# EAGLE board Bee Hive Mona parallel scara V0.1 (EAGLE 9.7.0)
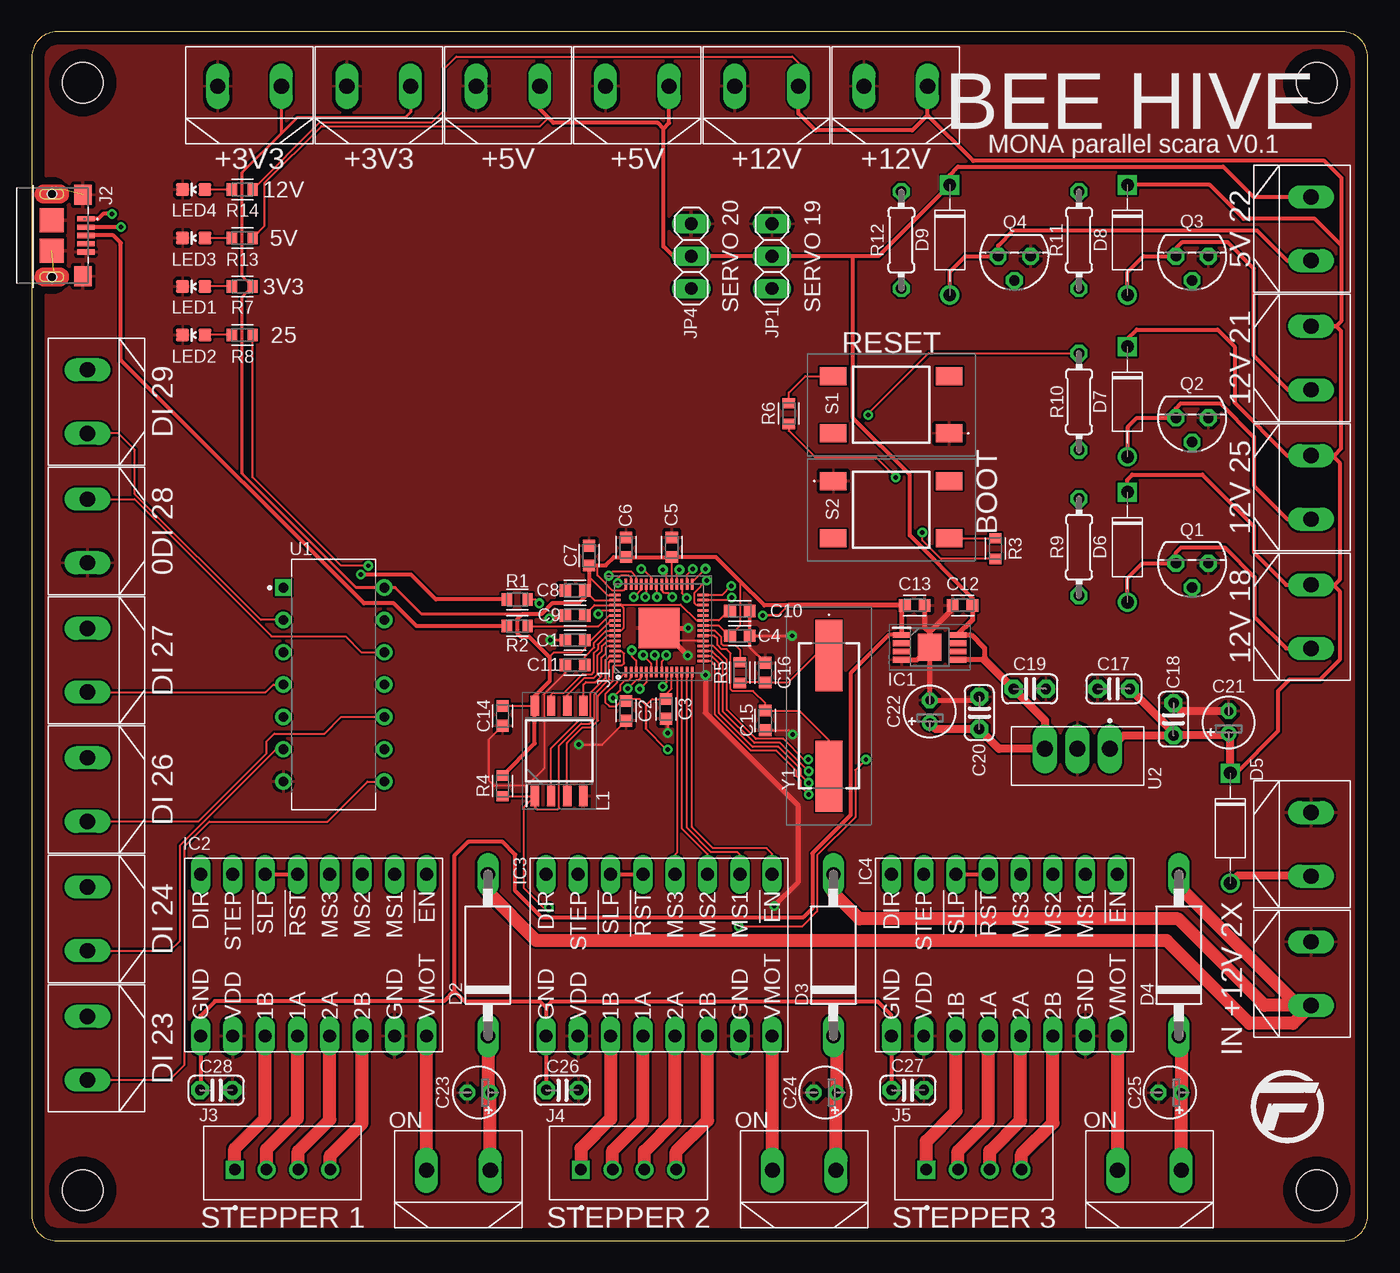
[diagram p0: board, top side]
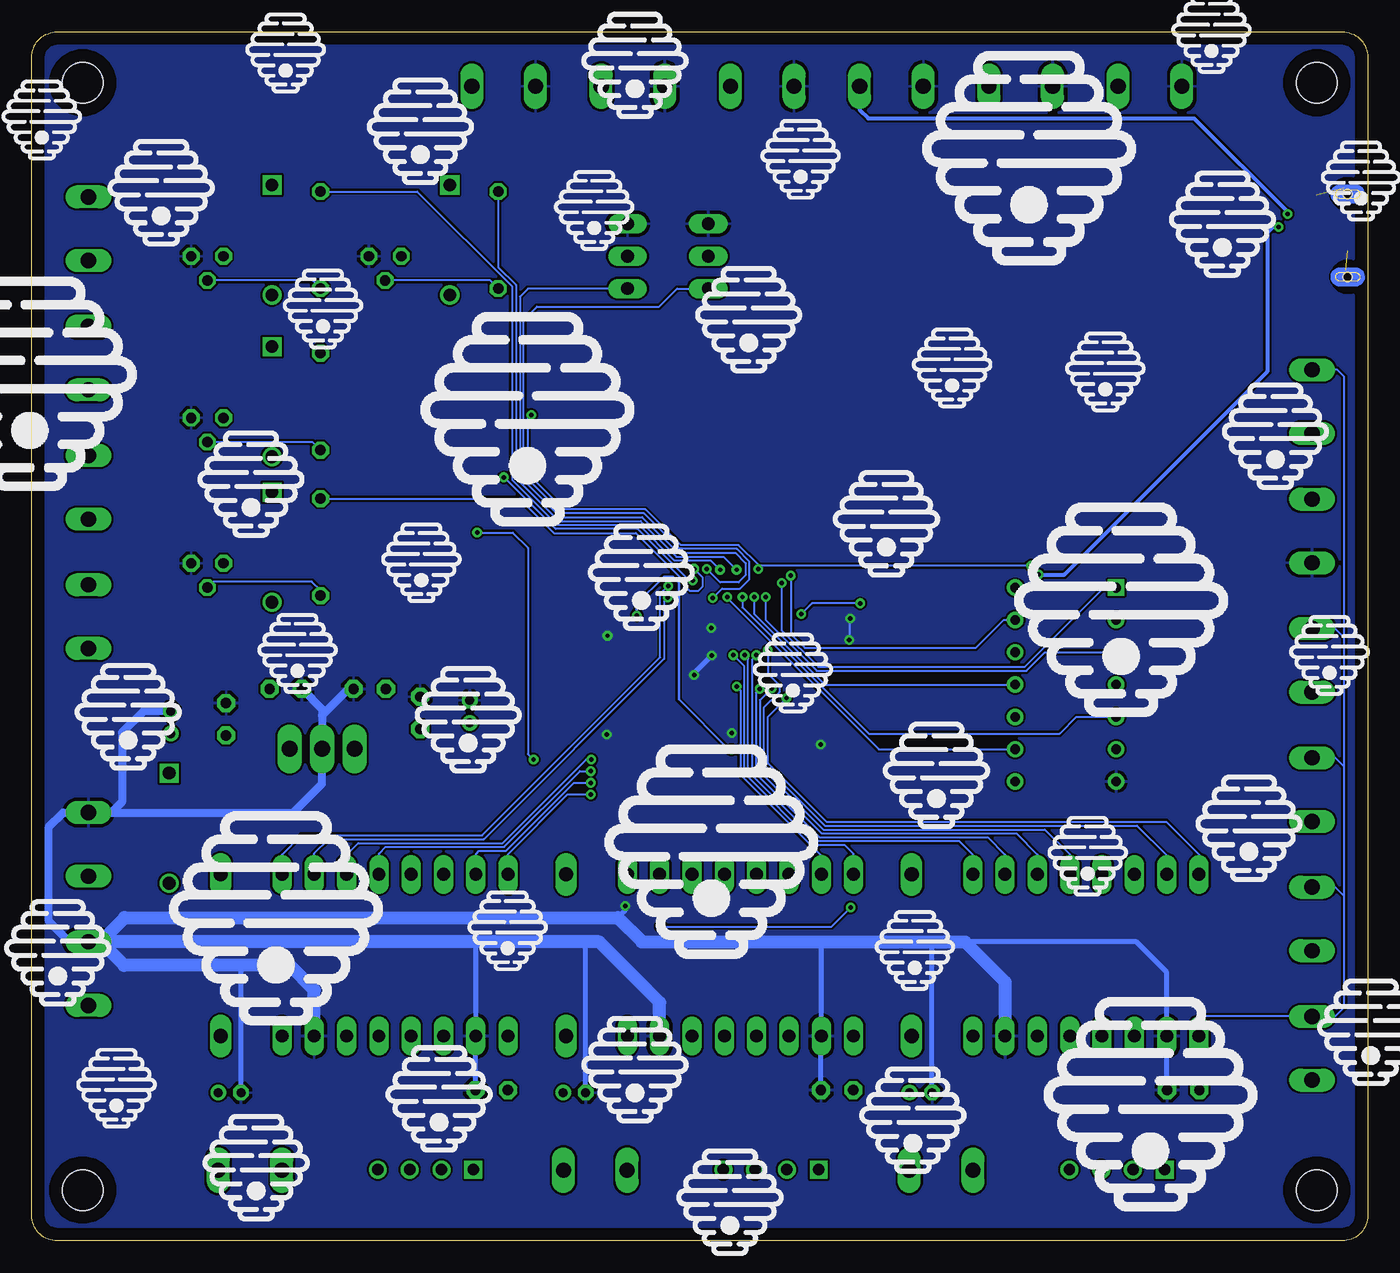
[diagram p1: board, bottom side, seen from below]

Size 105 x 95 mm. Coordinates in mm from the lower left corner, seen from the top.
Outline: 0,93 0,2 arc90 2,0 103,0 arc90 105,2 105,93 arc90 103,95 2,95 arc90 0,93
Copper layers (1*16): Top / Bottom
Stack-up Default Layer Stack: Top User Defined 0.035mm / Dielectric-1 User Defined 1.5mm / Bottom User Defined 0.035mm
Design rules: minimum drill size 0.35mm, minimum copper width 6mil, keepout clearance 0mil, drill distance 6mil, via restrict clearance 0mil, dimension clearance 40mil, restrict clearance 0mil, copper clearance wire_polygon to wire_polygon 6mil, copper clearance wire_polygon to pad_smd 6mil, copper clearance wire_polygon to via 6mil, copper clearance pad_smd to pad_smd 6mil, copper clearance pad_smd to via 6mil, copper clearance via to via 6mil, copper clearance smd to pad (same net) 6mil, copper clearance smd to via (same net) 6mil, copper clearance smd to smd (same net) 6mil
Holes 3.2 mm at 4,91 101,91 101,4 4,4

## Footprints (pad centres in the part's own frame; a part is rotated, then mirrored left to right if it is on the bottom)
CAPC1608X85 = smd 0.921 x 0.97: 1 -0.775,0; 2 0.775,0
C025-024X044 = drill 0.813 pad 1.422 octagon: 1 -1.27,0; 2 1.27,0
E1,8-4 = drill 0.711 pad 1.168: + -0.889,0 | drill 0.711 pad 1.168 octagon: - 0.889,0
DO15-12 = drill 1.118 long: A 6.35,0; C -6.35,0
DO-41 = drill 1: A 4.325,0 | drill 1 square: C -4.325,0
SOP65P490X110-9N = smd 1.4 x 0.45: 1 -2.2,0.975; 2 -2.2,0.325; 3 -2.2,-0.325; 4 -2.2,-0.975; 5 2.2,-0.975; 6 2.2,-0.325; 7 2.2,0.325; 8 2.2,0.975 | smd 1.846 x 2.15: 9 0,0
A4988 = drill 1.016 long: 1 -6.35,8.89; 2 -6.35,6.35; 3 -6.35,3.81; 4 -6.35,1.27; 5 -6.35,-1.27; 6 -6.35,-3.81; 7 -6.35,-6.35; 8 -6.35,-8.89; 9 6.35,-8.89; 10 6.35,-6.35; 11 6.35,-3.81; 12 6.35,-1.27; 13 6.35,1.27; 14 6.35,3.81; 15 6.35,6.35; 16 6.35,8.89
QFN40P700X700X90-57N = smd 0.85 x 0.2: 1 -3.45,2.6; 2 -3.45,2.2; 3 -3.45,1.8; 4 -3.45,1.4; 5 -3.45,1; 6 -3.45,0.6; 7 -3.45,0.2; 8 -3.45,-0.2; 9 -3.45,-0.6; 10 -3.45,-1; 11 -3.45,-1.4; 12 -3.45,-1.8; 13 -3.45,-2.2; 14 -3.45,-2.6; 29 3.45,-2.6; 30 3.45,-2.2; 31 3.45,-1.8; 32 3.45,-1.4; 33 3.45,-1; 34 3.45,-0.6; 35 3.45,-0.2; 36 3.45,0.2; 37 3.45,0.6; 38 3.45,1; 39 3.45,1.4; 40 3.45,1.8; 41 3.45,2.2; 42 3.45,2.6 | smd 0.2 x 0.85: 15 -2.6,-3.45; 16 -2.2,-3.45; 17 -1.8,-3.45; 18 -1.4,-3.45; 19 -1,-3.45; 20 -0.6,-3.45; 21 -0.2,-3.45; 22 0.2,-3.45; 23 0.6,-3.45; 24 1,-3.45; 25 1.4,-3.45; 26 1.8,-3.45; 27 2.2,-3.45; 28 2.6,-3.45; 43 2.6,3.45; 44 2.2,3.45; 45 1.8,3.45; 46 1.4,3.45; 47 1,3.45; 48 0.6,3.45; 49 0.2,3.45; 50 -0.2,3.45; 51 -0.6,3.45; 52 -1,3.45; 53 -1.4,3.45; 54 -1.8,3.45; 55 -2.2,3.45; 56 -2.6,3.45 | smd 3.2 x 3.2: 57 0,0
TE_2013499-1 = smd 0.4 x 1.35: 1 -1.3,0; 2 -0.65,0; 3 0,0; 4 0.65,0; 5 1.3,0 | smd 1.6 x 1.4: 6 3.2,-0.225; 7 -3.2,-0.225 | smd 1.9 x 1.9: 8 -1.2,-2.675; 9 1.2,-2.675 | smd 0.1 x 0.1: 10 -3.76,-2.37; 11 2.75,-2.53 | hole 0.71: -3.255,-2.675; 3.255,-2.675
B4B-XH-A(LF)(SN) = drill 0.9 square: 1 -3.75,0 | drill 0.9: 2 -1.25,0; 3 1.25,0; 4 3.75,0
1X03 = drill 1.016 long: 1 -2.54,0; 2 0,0; 3 2.54,0
SOIC127P780X195-8N = smd 1.6 x 0.65: 1 -3.55,1.905; 2 -3.55,0.635; 3 -3.55,-0.635; 4 -3.55,-1.905; 5 3.55,-1.905; 6 3.55,-0.635; 7 3.55,0.635; 8 3.55,1.905
0603-GREEN = smd 1 x 1: A 0,-0.877; C 0,0.877
0603-BLUE = smd 1 x 1: A 0,-0.877; C 0,0.877
TO92 = drill 0.813 octagon: 1 1.27,0; 2 0,1.905; 3 -1.27,0
RESC1608X60 = smd 0.799 x 0.974: 1 -0.815,0; 2 0.815,0
0204/7 = drill 0.813 octagon: 1 -3.81,0; 2 3.81,0
TS046665BK160SMT = smd 2.1 x 1.4: 1 -4.55,2.25; 2 -4.55,-2.25; 3 4.55,2.25; 4 4.55,-2.25
DIP794W45P254L1969H508Q14 = drill 0.77 pad 1.17 square: 1 -3.97,7.62 | drill 0.77 pad 1.17: 2 -3.97,5.08; 3 -3.97,2.54; 4 -3.97,0; 5 -3.97,-2.54; 6 -3.97,-5.08; 7 -3.97,-7.62; 8 3.97,-7.62; 9 3.97,-5.08; 10 3.97,-2.54; 11 3.97,0; 12 3.97,2.54; 13 3.97,5.08; 14 3.97,7.62
TO255P1040X460X1968-3 = drill 1.27 pad 1.91 long: 1 0,0; 2 2.55,0; 3 5.1,0
KF301-2P = drill 1.2 pad 1.778 long: 1 -2.5,0; 2 2.5,0
ABLS = smd 5.6 x 2.1: 1 -4.75,0; 2 4.75,0

## Placement (x,y rotation side)
C1  100nF  [CAPC1608X85]  42.7,47.2 180 top
C2  100nF  [CAPC1608X85]  46.7,41.65 270 top
C3  100nF  [CAPC1608X85]  49.85,41.8 270 top
C4  100nF  [CAPC1608X85]  55.65,47.55 0 top
C5  100nF  [CAPC1608X85]  50.3,54.5 90 top
C6  100nF  [CAPC1608X85]  46.7,54.5 90 top
C7  100nF  [CAPC1608X85]  43.8,53.85 90 top
C8  1uF  [CAPC1608X85]  42.7,51.1 180 top
C9  1uF  [CAPC1608X85]  42.7,49.15 180 top
C10  100nF  [CAPC1608X85]  55.65,49.5 0 top
C11  100nF  [CAPC1608X85]  42.7,45.25 180 top
C12  100nF  [CAPC1608X85]  73.16,49.93 180 top
C13  100nF  [CAPC1608X85]  69.4,49.93 0 top
C14  100nF  [CAPC1608X85]  37,41.25 270 top
C15  27p  [CAPC1608X85]  57.65,40.9 90 top
C16  27p  [CAPC1608X85]  57.65,44.65 270 top
C17  10uF  [C025-024X044]  85.04,43.37 180 top
C18  100nF  [C025-024X044]  89.73,40.99 90 top
C19  10uF  [C025-024X044]  78.44,43.37 0 top
C20  100nF  [C025-024X044]  74.47,41.49 90 top
C21  100uF  [E1,8-4]  94.07,40.74 90 top
C22  100uf  [E1,8-4]  70.58,41.59 90 top
C23  100uf  [E1,8-4]  35.13,11.65 180 top
C24  100uf  [E1,8-4]  62.35,11.65 180 top
C25  100uf  [E1,8-4]  89.45,11.65 180 top
C26  100nF  [C025-024X044]  41.7,11.85 0 top
C27  100nF  [C025-024X044]  68.85,11.85 0 top
C28  100nF  [C025-024X044]  14.5,11.85 0 top
D2  BY299  [DO15-12]  35.85,22.45 90 top
D3  BY299  [DO15-12]  63,22.45 90 top
D4  BY299  [DO15-12]  90.15,22.45 90 top
D5  1N4007  [DO-41]  94.2,32.43 270 top
D6  1N4007  [DO-41]  86.12,54.51 270 top
D7  1N4007  [DO-41]  86.12,65.94 270 top
D8  1N4007  [DO-41]  86.12,78.64 270 top
D9  1N4007  [DO-41]  72.15,78.64 270 top
IC1  TLV76733DGNR  [SOP65P490X110-9N]  70.57,46.64 0 top
IC2  1182-A4988  [A4988]  22.15,22.45 270 top
IC3  1182-A4988  [A4988]  49.3,22.45 270 top
IC4  1182-A4988  [A4988]  76.45,22.45 270 top
J1  SC0914_7_  [QFN40P700X700X90-57N]  49.3,48.15 90 top
J2  2013499-1  [TE_2013499-1]  4.25,79 270 top
J3  B4B-XH-A(LF)(SN)  [B4B-XH-A(LF)(SN)]  19.7,5.6 0 top
J4  B4B-XH-A(LF)(SN)  [B4B-XH-A(LF)(SN)]  46.9,5.6 0 top
J5  B4B-XH-A(LF)(SN)  [B4B-XH-A(LF)(SN)]  74.05,5.6 0 top
JP1  PINHD-1X3  [1X03]  58.18,77.37 270 top
JP4  PINHD-1X3  [1X03]  51.83,77.37 270 top
L1  W25Q128JVSIQ_TR  [SOIC127P780X195-8N]  41.45,38.5 90 top
LED1  LED-GREEN0603  [0603-GREEN]  12.73,74.99 90 top
LED2  LED-BLUE0603  [0603-BLUE]  12.73,71.18 90 top
LED3  LED-GREEN0603  [0603-GREEN]  12.73,78.8 90 top
LED4  LED-GREEN0603  [0603-GREEN]  12.73,82.61 90 top
Q1  BC327  [TO92]  91.2,53.24 180 top
Q2  BC327  [TO92]  91.2,64.67 180 top
Q3  BC327  [TO92]  91.2,77.37 180 top
Q4  BC327  [TO92]  77.23,77.37 180 top
R1  27R  [RESC1608X60]  38.15,50.4 0 top
R2  27R  [RESC1608X60]  38.15,48.3 0 top
R3  1k  [RESC1608X60]  75.74,54.4 270 top
R4  DNP  [RESC1608X60]  37,35.75 90 top
R5  1k  [RESC1608X60]  55.65,44.65 90 top
R6  1k  [RESC1608X60]  59.5,65 270 top
R7  330R  [RESC1608X60]  16.54,74.99 0 top
R8  330R  [RESC1608X60]  16.54,71.18 0 top
R9  1k  [0204/7]  82.31,54.51 270 top
R10  1k  [0204/7]  82.31,65.94 270 top
R11  1k  [0204/7]  82.31,78.64 270 top
R12  1k  [0204/7]  68.34,78.64 270 top
R13  330R  [RESC1608X60]  16.54,78.8 0 top
R14  1k  [RESC1608X60]  16.54,82.61 0 top
S1  TS04-66-65-BK-160-SMT  [TS046665BK160SMT]  67.55,65.7 180 top
S2  TS04-66-65-BK-160-SMT  [TS046665BK160SMT]  67.55,57.45 0 top
U1  SN74HC14N  [DIP794W45P254L1969H508Q14]  23.74,43.71 0 top
U2  L7805CV  [TO255P1040X460X1968-3]  84.74,38.66 180 top
U$1  TERMINAL_2P  [KF301-2P]  33.53,5.55 0 top
U$2  TERMINAL_2P  [KF301-2P]  60.71,5.55 0 top
U$3  TERMINAL_2P  [KF301-2P]  87.85,5.55 0 top
U$4  TERMINAL_2P  [KF301-2P]  100.55,31.16 270 top
U$5  TERMINAL_2P  [KF301-2P]  100.55,21 270 top
U$6  TERMINAL_2P  [KF301-2P]  100.55,49.05 270 top
U$7  TERMINAL_2P  [KF301-2P]  100.55,59.21 270 top
U$8  TERMINAL_2P  [KF301-2P]  100.55,69.37 270 top
U$9  TERMINAL_2P  [KF301-2P]  100.55,79.53 270 top
U$10  TERMINAL_2P  [KF301-2P]  67.91,90.72 0 top
U$11  TERMINAL_2P  [KF301-2P]  37.43,90.72 0 top
U$12  TERMINAL_2P  [KF301-2P]  17.11,90.72 0 top
U$15  TERMINAL_2P  [KF301-2P]  57.75,90.72 0 top
U$16  TERMINAL_2P  [KF301-2P]  47.59,90.72 0 top
U$17  TERMINAL_2P  [KF301-2P]  27.27,90.72 0 top
U$18  TERMINAL_2P  [KF301-2P]  4.38,45.62 90 top
U$19  TERMINAL_2P  [KF301-2P]  4.38,25.3 90 top
U$20  TERMINAL_2P  [KF301-2P]  4.38,35.46 90 top
U$21  TERMINAL_2P  [KF301-2P]  4.38,15.14 90 top
U$22  TERMINAL_2P  [KF301-2P]  4.38,55.78 90 top
U$23  TERMINAL_2P  [KF301-2P]  4.38,65.94 90 top
Y1  ABLS-12.000MHZ-B4-T  [ABLS]  62.65,41.25 270 top

## Library data of the parts
C1-C16 = Capacitor; CATEGORY: Capacitor
C17-C28 = adafruit
D2-D4 = diode
D5-D9 = Diodes; CREATED_BY: PCBLayout.com; DIGIKEY_PART_NUMBER: 1N4007MSCT-ND; MANUFACTURER: Micro Commercial Co; MPN: 1N4007; PACKAGE: DO-41
IC1 = TLV76733DGNR; DESCRIPTION: LDO Voltage Regulators 1-A, 16-V, high-PSRR, high-accuracy, low-dropout voltage regulator with enable; HEIGHT: 1.1mm; MANUFACTURER_NAME: Texas Instruments; MANUFACTURER_PART_NUMBER: TLV76733DGNR; MOUSER_PART_NUMBER: 595-TLV76733DGNR; MOUSER_PRICE-STOCK: https://www.mouser.co.uk/ProductDetail/Texas-Instruments/TLV76733DGNR?qs=W%2FMpXkg%252BdQ7WCurh%2FfEdlw%3D%3D
IC2-IC4 = pololu-stepper-driver
J1 = SC0914_7_; DESCRIPTION: Microcontrollers connect the world of software to the world of hardware. They allow developers to write software which interacts with the physical world in the same deterministic, cycle-accurate manner as digital logic. They occupy the bottom left corner of the price/performance space, outselling their more powerful brethren by a factor of ten to one. They are the workhorses that power the digital transformation of our world.; HEIGHT: 0.9mm; MANUFACTURER_NAME: RASPBERRY-PI; MANUFACTURER_PART_NUMBER: SC0914(7); MOUSER_PART_NUMBER: 358-SC09147; MOUSER_PRICE-STOCK: https://www.mouser.co.uk/ProductDetail/Raspberry-Pi/SC09147?qs=T%252BzbugeAwjhSpdbCB4ve%252Bg%3D%3D
J2 = 2013499-1; AVAILABILITY: In Stock; CENTERLINE_PITCH: .65 mm[.025 in]; COMMENT: 2013499-1; DESCRIPTION: USB - micro B USB 2.0 Receptacle Connector 5 Position Surface Mount, Right Angle; Through Hole; MF: TE Connectivity; MP: 2013499-1; NUMBER_OF_POSITIONS: 5; PACKAGE: None; PRICE: None; PRODUCT_TYPE: Connector; PURCHASE-URL: https://pricing.snapeda.com/search?q=2013499-1&ref=eda
J3-J5 = Headers; CREATED_BY: PCBLayout.com; DIGIKEY_PARTNO: 455-2249-ND; MANUFACTURER: JST Sales America Inc.; MPN: B4B-XH-A(LF)(SN)
JP1 JP4 = Connector; CATEGORY: Headers; DESCRIPTION: Header, Straight, 3 Position; MANUFACTURER: Generic; MPN: Generic; OPERATING_TEMPERATURE: Generic; PART_STATUS: Active; PITCH: 0.100" (2.54mm); ROHS_COMPLIANCE: Generic; SERIES: Generic; SUB-CATEGORY: Headers, Male Pins; TYPE: Board to Board or Cable, Unshrouded, Through Hole, Straight
L1 = W25Q128JVSIQ_TR; DESCRIPTION: FLASH - NOR Memory IC 128Mb (16M x 8) SPI - Quad I/O 8-SOIC; HEIGHT: 1.95mm; MANUFACTURER_NAME: Winbond; MANUFACTURER_PART_NUMBER: W25Q128JVSIQ TR; MOUSER_PART_NUMBER: 454-W25Q128JVSIQTR; MOUSER_PRICE-STOCK: https://www.mouser.co.uk/ProductDetail/Winbond/W25Q128JVSIQ-TR?qs=qSfuJ%252Bfl%2Fd7vTyLA9kNdGw%3D%3D
LED1-LED4 = BeagleBone_Blue_R3
Q1-Q4 = transistor-pnp
R1-R8 R13 R14 = Resistor; CATEGORY: Resistor; SUB-CATEGORY: Fixed
R9-R12 = rcl; SPICEPREFIX: R
S1 S2 = TS04-66-65-BK-160-SMT; DESCRIPTION: Tactile Switches 6 x 6 mm, 6.5 mm Act Height, 160 gf, Black, Surface Mount, SPST,; HEIGHT: 6.7mm; MANUFACTURER_NAME: CUI Devices; MANUFACTURER_PART_NUMBER: TS04-66-65-BK-160-SMT; MOUSER_PART_NUMBER: 179-TS046665BK160SMT; MOUSER_PRICE-STOCK: https://www.mouser.co.uk/ProductDetail/CUI-Devices/TS04-66-65-BK-160-SMT?qs=A6eO%252BMLsxmTgRLoTHWtDYQ%3D%3D
U1 = SN74HC14N; AVAILABILITY: In Stock; DESCRIPTION: 6-ch, 2-V to 6-V inverters with Schmitt-Trigger inputs; MF: Texas Instruments; MP: SN74HC14N; PACKAGE: PDIP-14 Texas Instruments; PRICE: None; PURCHASE-URL: https://pricing.snapeda.com/search/part/SN74HC14N/?ref=eda
U2 = L7805CV; AVAILABILITY: In Stock; DESCRIPTION: Linear Voltage Regulator IC Positive Fixed 1 Output 1.5A TO-220; MF: STMicroelectronics; MP: L7805CV; PACKAGE: TO-220-3 STMicroelectronics; PRICE: None; PURCHASE-URL: https://pricing.snapeda.com/search/part/L7805CV/?ref=eda
U$1-U$12 U$15-U$23 = KF301-2P-Terminal
Y1 = ABLS-12.000MHZ-B4-T

## Nets
1.1V: C9.1 C10.1 C11.1 J1.23 J1.45 J1.50
+3V3: C1.1 C2.1 C3.1 C4.1 C5.1 C6.1 C7.1 C8.1 C13.1 C14.1 C26.1 C27.1 C28.1 IC1.1 IC2.9 IC3.9 IC4.9 J1.1 J1.10 J1.22 J1.33 J1.42 J1.43 J1.44 J1.48 J1.49 L1.8 R4.2 R7.2 U1.14 U$12.2 U$17.2 U$18.2 U$19.2 U$20.2 U$21.2 U$23.2
+5V: C12.1 C19.1 C20.1 C22.+ D9.C IC1.5 IC1.8 J2.1 JP1.2 JP4.2 R13.2 U2.3 U$9.1 U$11.2 U$16.2
+12V: C17.1 C18.1 C21.+ D5.C D6.C D7.C D8.C R14.2 U2.1 U$6.1 U$7.1 U$8.1 U$10.2 U$15.2
GND: C1.2 C2.2 C3.2 C4.2 C5.2 C6.2 C7.2 C8.2 C9.2 C10.2 C11.2 C12.2 C13.2 C14.2 C15.1 C16.1 C17.2 C18.2 C19.2 C20.2 C21.- C22.- C23.- C24.- C25.- C26.2 C27.2 C28.2 IC1.4 IC1.9 IC2.10 IC2.15 IC3.10 IC3.15 IC4.10 IC4.15 J1.19 J1.57 J2.5 J2.6 J2.7 J2.8 J2.9 J2.10 J2.11 JP1.1 JP4.1 L1.4 LED1.C LED2.C LED3.C LED4.C Q1.3 Q2.3 Q3.3 Q4.3 S1.1 S2.1 U1.7 U2.2 U$4.1 U$5.1 U$10.1 U$11.1 U$12.1 U$15.1 U$16.1 U$17.1 U$22.1
GPIO0: IC2.8 J1.2
GPIO1: IC2.7 J1.3
GPIO2: IC2.4 J1.4
GPIO3: IC2.3 J1.5
GPIO4: IC2.2 J1.6
GPIO5: IC2.1 J1.7
GPIO6: IC3.8 J1.8
GPIO7: IC3.7 J1.9
GPIO8: IC3.4 J1.11
GPIO9: IC3.3 J1.12
GPIO10: IC3.2 J1.13
GPIO11: IC3.1 J1.14
GPIO12: IC4.8 J1.15
GPIO13: IC4.7 J1.16
GPIO14: IC4.4 J1.17
GPIO15: IC4.3 J1.18
GPIO16: IC4.2 J1.27
GPIO17: IC4.1 J1.28
GPIO18: J1.29 R9.1
GPIO19: J1.30 JP1.3
GPIO20: J1.31 JP4.3
GPIO21: J1.32 R11.1
GPIO22: J1.34 R12.1
GPIO23: J1.35 U1.9
GPIO24: J1.36 U1.5
GPIO25: J1.37 R8.2 R10.1
GPIO26/ADC0: J1.38 U1.11
GPIO27/ADC1: J1.39 U1.3
GPIO28/ADC2: J1.40 U1.13
GPIO29/ADC3: J1.41 U1.1
N$3: D5.A U$4.2
N$4: R3.1 S2.4
N$5: R6.1 S1.4
N$6: C16.2 R5.1 Y1.1
N$8: LED2.A R8.1
N$10: IC2.11 J3.1
N$11: IC2.12 J3.2
N$12: IC2.13 J3.3
N$13: IC2.14 J3.4
N$14: IC2.5 IC2.6
N$16: IC2.16 U$1.1
N$17: IC3.16 U$2.1
N$18: IC4.16 U$3.1
N$22: IC3.11 J4.1
N$23: IC3.12 J4.2
N$24: IC3.13 J4.3
N$25: IC3.14 J4.4
N$26: IC3.5 IC3.6
N$30: C23.+ D2.C U$1.2
N$31: C24.+ D3.C U$2.2
N$32: C25.+ D4.C U$3.2
N$33: IC4.11 J5.1
N$34: IC4.12 J5.2
N$35: IC4.13 J5.3
N$36: IC4.14 J5.4
N$37: IC4.5 IC4.6
N$39: D6.A Q1.1 U$6.2
N$40: LED1.A R7.1
N$41: Q1.2 R9.2
N$42: D7.A Q2.1 U$7.2
N$43: Q2.2 R10.2
N$44: D8.A Q3.1 U$8.2
N$45: Q3.2 R11.2
N$46: D9.A Q4.1 U$9.2
N$47: Q4.2 R12.2
N$48: LED3.A R13.1
N$49: LED4.A R14.1
N$50: U1.8 U$21.1
N$52: U1.6 U$19.1
N$53: U1.4 U$18.1
N$54: U1.2 U$23.1
N$55: U1.10 U$20.1
N$56: U1.12 U$22.2
QSPI_SCLK: J1.52 L1.6
QSPI_SD0: J1.53 L1.5
QSPI_SD1: J1.55 L1.2
QSPI_SD2: J1.54 L1.3
QSPI_SD3: J1.51 L1.7
QSPI_SS: J1.56 L1.1 R3.2 R4.1
RUN: J1.26 R6.2
SWCLK: J1.24
SWDIO: J1.25
USB_D+: J2.3 R2.1
USB_D-: J2.2 R1.1
USB_DM: J1.46 R1.2
USB_DP: J1.47 R2.2
USB_ID: J2.4
VSS: D2.A D3.A D4.A U$5.2
XIN: C15.2 J1.20 Y1.2
XOUT: J1.21 R5.2

## Tracks (layer width: path | path; a pad name or v marks a point on that pad's centre or on a via)
1.1V
  Top 0.152: C9.1 43.48,49.2 44.23,49.95 J1.45 | C11.1 43.48,45.9 44.2,46.62 44.2,47 45.15,47.95 J1.50 46.3,47.95 46.5,48.16 46.5,49.74 46.3,49.95 J1.45 | C10.1 54.75,49.5 54,48.75 J1.23 52.25,48.75 51,50 46.35,50 46.3,49.95 J1.45
+3V3  (via drill 0.35)
  Top 0.152: 43.8,52.2 45.25,50.75 J1.43 J1.44 44.23,50.35 C8.1 | 45.3,48.55 43.95,47.2 C1.1 43.48,46.52 43.17,46.23 41.02,46.23 40.73,45.92 40.73,45.83 | J1.48 45.5,48.75 45.3,48.55 | J1.49 45.5,48.35 45.3,48.55 | J1.22 54,48.35 54.8,47.55 C4.1 55.65,48.33 55.65,51.85 | 39.52,42.02 L1.8 37.02,42.05 C14.1 | J1.10 50.3,43.4 49.85,42.95 C3.1 48.75,42.58 48.26,42.09 47.77,42.58 46.85,42.58 C2.1 46.35,42.42 45.92,42 45.4,42 45.06,42.34 45.06,42.94 45.99,43.87 45.99,43.99 J1.1 | C5.1 J1.33 | J1.42 46.7,51.35 46.45,51.1 45.65,51.1 44.45,52.3 44.45,53.08
  Top 0.2: v57.45,49.15 58.69,49.15 59.47,49.93 | v50,38.6 49.88,38.6 48.26,40.22 48.26,42.09
  Top 0.254: 67.56,11.87 C27.1 | IC3.9 40.43,16.08 | 13.26,11.88 C28.1 | 38.54,49.24 38.54,49.25 30.65,49.25 28.57,51.33 U1.14 25.51,51.33 16.55,60.29 16.55,74.19 R7.2 16.55,75.8 16.55,83.95 19.61,87.01 | U$12.2 19.61,87.01 | U$17.2 29.77,88.67 29.35,88.25 20.85,88.25 19.61,87.01
  Top 0.305: L1.8 39.55,42.84 40.73,44.02 40.73,45.83 39.07,47.48 38.42,47.48 38.15,47.76 38.15,48.85 38.54,49.24 40.05,49.24 40.91,50.1 42.98,50.1 43.48,50.6 C8.1 43.8,51.42 43.8,52.2 C7.1 44.45,53.08 45.1,53.08 45.75,53.73 C6.1 C5.1 53.77,53.73 55.65,51.85 57.57,49.93 59.65,49.93 | R4.2 39.52,39.09 39.52,42.02 | 67.56,11.87 IC4.9 67.56,17.74 66.5,18.8 40.85,18.8 40.41,18.36 | 40.41,18.36 IC3.9 | 40.41,18.36 39.92,18.85 34,18.85 33.2,19.65 | 40.43,16.08 C26.1 | 13.26,11.88 IC2.9 13.26,17.71 14.4,18.85 32.4,18.85 33.2,19.65 | IC1.1 67.36,47.62 64.35,44.6 64.35,33.45 61.35,30.45 61.35,26.15 60.6,25.4 40.1,25.4 38,27.5 38,30.35 37,31.35 34.3,31.35 33.2,30.25 33.2,19.65
  Top 0.406: IC1.1 68.37,49.67 C13.1 59.65,49.93 59.47,49.93
  Bottom 0.152: IC2.9 13.26,17.45 13.07,17.64 U$21.2 2.56,17.64 1.85,18.35 1.85,27.1 | 1.85,27.1 2.55,27.8 U$19.2 | 1.85,27.1 1.85,37.25 | 1.85,37.25 2.56,37.96 U$20.2 | 1.85,37.25 1.85,47.4 | 1.85,47.4 2.57,48.12 U$18.2 | U$23.2 2.39,68.44 1.85,67.9 1.85,47.4
  Bottom 0.2: v57.45,49.15 57.45,50.05 55.32,52.18 54.6,52.18 54.15,51.73 54.15,42.55 50.2,38.6 v50,38.6
+5V  (via drill 0.35)
  Top 0.152: R13.2 18.3,79.75 18.3,83.12 22.77,87.59 39.94,87.59 40.6,88.25
  Top 0.305: U$9.1 96.02,82.03 93.65,84.4 72.8,84.4 72.15,83.75 D9.C 66.56,77.37 64.55,77.37 | 64.55,77.37 JP1.2 JP4.2 50.43,77.37 49.65,78.15 49.65,87.4 | U$16.2 50.09,87.84 49.65,87.4 | U$11.2 39.93,88.92 40.6,88.25 41,87.85 49.2,87.85 49.65,87.4 | v6.3,80.7 5.6,80.7 5.2,80.3 J2.1 | C12.1 73.94,50.5 69,55.43 69,60.2 64.55,64.65 64.55,77.37
  Top 0.406: IC1.5 74.88,45.66 74.88,46.58 73.83,47.62 IC1.8 73.94,48.78 C12.1
  Top 0.61: C22.+ 71.06,40.22 C20.1 76.03,38.66 U2.3 79.64,40.9 C19.1 74.88,45.66
  Bottom 0.305: U$11.2 39.93,88.88 39.25,88.2 13.65,88.2 6.3,80.85 v6.3,80.7
+12V
  Top 0.152: R14.2 22.64,87.89 31.44,87.89 32.4,88.85 32.4,92.1 33.35,93.05 59.77,93.05 60.25,92.57 U$15.2
  Top 0.305: D7.C 86.12,70.87 86.85,71.6 93.2,71.6 94.54,70.26 94.54,65.86 98.69,61.71 U$7.1 | D8.C 92.58,82.97 95.25,80.3 100.85,80.3 102.95,78.2 | 102.95,78.2 102.95,72.3 102.55,71.9 100.58,71.9 U$8.1 102.53,71.87 102.9,71.5 102.9,62.25 102.36,61.71 U$7.1 | D6.C 86.1,58.85 86.1,59.8 86.5,60.2 92,60.2 96.05,56.15 96.05,54.1 98.6,51.55 U$6.1 | U$7.1 102.24,61.71 102.8,61.15 102.8,51.95 102.4,51.55 U$6.1 | U$6.1 102.3,51.55 102.8,51.05 102.8,45.65 101.25,44.1 98.85,44.1 97.95,43.2 97.95,40.05 94.66,36.76 D5.C | 102.95,78.2 102.95,83.5 101.59,84.86 73.99,84.86 70.41,88.44 70.41,88.45 | 70.41,88.45 U$10.2 | U$15.2 60.25,88.6 61.6,87.25 69.21,87.25 70.41,88.45
  Top 0.61: D5.C 94.2,39.72 C21.+ 93.94,39.72 C18.1 | C17.1 89.73,39.95 C18.1 | U2.1 85.8,39.72 C18.1
GND  (via drill 0.35)  (2 unrouted)
  Top 0.152: C15.1 59.48,40.12 v59.8,39.8 | C9.2 41.68,48.91 v40.68,48.91 | C1.2 v40.76,47.2 v40.75,47.21 | J1.19 50.3,47.15 J1.57 | C11.2 41.92,44.61 40.26,42.95 40.26,37.11 39.13,35.98 39.12,35.98 38.9,35.75 36.35,35.75 35.95,36.15 35.95,39.42 C14.2
  Top 0.2: C2.2 44.83,39 v43,39 | C3.2 50,40.88 v50,39.9
  Top 0.254: C10.2 C4.2 | C4.2 56.42,46.65 C16.1 | C4.2 v59.75,47.55
  Top 0.406: IC1.9 70.58,47.78 70.17,48.18 C13.2 | IC1.9 70.56,47.84 72.39,49.66 C12.2 | IC1.4 69.59,45.66 IC1.9 | IC1.9 C22.- 74.19,42.48 C20.2 | v51.6,48.15 J1.57 49.4,48.15 v51.55,46 | v52.95,44.45 52.95,41.5 60.2,34.25 60.2,28.15 v58.35,26.3
  Top 0.61: C21.- 90.36,41.63 C18.2
  Bottom 0.152: v40.75,47.21 40.68,47.28 v40.68,48.91
  Bottom 0.406: C25.- 88.56,21.61 88.6,21.65 | C24.- 61.46,23.46 61.5,23.5 | C23.- 34.24,23.44 34.3,23.5 | C26.2 42.97,16.08 IC3.10 42.95,23.5 | C27.2 70.12,16.08 IC4.10 70.1,23.5 | C28.2 15.77,16.07 IC2.10 15.8,21.1 18.2,23.5 31.65,23.5 | v51.55,46 52.95,44.6 v52.95,44.45 | v58.35,26.3 58.35,26 58.95,25.4
  Bottom 0.61: C21.- 96.22,41.63 97.9,39.95 97.9,34.5 98.74,33.66 U$4.1 | C17.2 82.19,41.79 U2.2 | C19.2 80.11,43.37 82.19,41.29 U2.2 | U$4.1 84.44,33.66 82.19,35.91 U2.2 | U$5.1 102.05,23.5 103.65,25.1 103.65,32.55 102.54,33.66 U$4.1
  Bottom 1.016: IC2.15 28.5,20.35 31.65,23.5 34.3,23.5 42.95,23.5 57.05,23.5 58.95,25.4 97.7,25.4 99.6,23.5 | IC3.15 55.65,18.75 60.4,23.5 61.5,23.5 70.1,23.5 99.6,23.5 | U$5.1 99.6,23.5 | IC4.15 82.8,19.7 84.75,21.65 88.6,21.65 97.75,21.65 99.6,23.5
  pour Top: 105.13,95.13 2,95.13 1.67,95.1 1.34,95.02 1.03,94.9 0.75,94.72 0.5,94.5 0.28,94.25 0.1,93.97 -0.02,93.66 -0.1,93.33 -0.13,93 -0.13,-0.13 105.13,-0.13
  pour Bottom: 105.13,95.13 2,95.13 1.67,95.1 1.34,95.02 1.03,94.9 0.75,94.72 0.5,94.5 0.28,94.25 0.1,93.97 -0.02,93.66 -0.1,93.33 -0.13,93 -0.13,-0.13 105.13,-0.13
GPIO0  (via drill 0.35)
  Top 0.152: v45.68,42.65 45.68,42.7 46.24,43.25 46.24,43.66 46.6,44.02 46.87,44.02 47.1,44.25 J1.2
  Bottom 0.152: v45.68,42.65 47.17,41.16 47.17,37.56 42.54,32.93 15.83,32.93 13.25,30.35 IC2.8
GPIO1  (via drill 0.35)
  Top 0.152: v47.15,46.41 47.15,45.95 47.5,45.6 J1.3
  Bottom 0.152: IC2.7 15.8,30.3 18.13,32.63 42.67,32.63 47.48,37.44 47.48,41.88 46.24,43.11 46.24,43.67 47.15,44.57 v47.15,46.41
GPIO2  (via drill 0.35)
  Top 0.152: J1.4 47.83,44.63 47.83,44.18 47.7,44.05 47.48,44.05 v46.85,43.42
  Bottom 0.152: v46.85,43.42 47.78,42.48 47.78,37.31 42.79,32.32 25.37,32.32 23.42,30.37 IC2.4
GPIO3  (via drill 0.35)
  Top 0.152: J1.5 48.3,43.9 v47.78,43.38
  Bottom 0.152: v47.78,43.38 48.09,43.08 48.09,37.19 42.92,32.02 27.62,32.02 25.96,30.36 IC2.3
GPIO4  (via drill 0.35)
  Top 0.152: J1.6 48.7,45.36 v48.04,46.02
  Bottom 0.152: IC2.2 28.5,30.35 29.86,31.71 43.07,31.71 48.39,37.03 48.39,45.67 v48.04,46.02
GPIO5  (via drill 0.35)
  Top 0.152: v48.95,46.02 49.1,45.87 J1.7
  Bottom 0.152: IC2.1 31.04,30.34 32.11,31.41 43.2,31.41 48.7,36.91 48.7,45.76 v48.95,46.02
GPIO6  (via drill 0.35)
  Top 0.152: v49.86,46.02 49.86,45.86 49.5,45.5 J1.8
  Bottom 0.152: IC3.8 40.41,30.41 41.1,31.11 43.35,31.11 49,36.76 49,45.16 v49.86,46.02
GPIO7  (via drill 0.35)
  Top 0.152: v49.61,43.57 49.61,43.61 49.9,43.9 J1.9
  Bottom 0.152: IC3.7 42.95,30.25 49.31,36.61 49.31,43.27 v49.61,43.57
GPIO8
  Top 0.152: IC3.4 50.57,30.35 50.7,30.48 J1.11
GPIO9
  Top 0.152: IC3.3 53.11,30.39 51.1,32.4 J1.12
GPIO10
  Top 0.152: IC3.2 55.65,30.35 55.45,30.55 53.4,30.55 51.5,32.45 J1.13
GPIO11
  Top 0.152: IC3.1 58.19,30.41 57.74,30.86 53.55,30.86 51.9,32.51 J1.14
GPIO12  (via drill 0.35)
  Top 0.152: J1.15 53.41,45.55 53.72,45.25 53.72,41.34 56.53,38.52 58.51,38.52 60.05,36.99 60.05,36.54 60.4,36.19 60.4,35.74 v61.05,35.09
  Bottom 0.152: v61.05,35.09 62.87,35.09 67.56,30.4 IC4.8
GPIO13  (via drill 0.35)
  Top 0.152: J1.16 53.44,45.95 54.02,45.37 54.02,41.47 56.66,38.83 58.67,38.83 60.4,37.09 60.4,36.65 v61.05,35.99
  Bottom 0.152: IC4.7 70.1,30.39 69.84,30.65 67.74,30.65 62.4,35.99 v61.05,35.99
GPIO14  (via drill 0.35)
  Top 0.152: J1.17 53.48,46.35 54.33,45.5 54.33,41.59 56.79,39.13 58.82,39.13 v61.05,36.9
  Bottom 0.152: IC4.4 77.72,30.43 77.19,30.95 67.87,30.95 61.92,36.9 v61.05,36.9
GPIO15  (via drill 0.35)
  Top 0.152: J1.18 53.54,46.75 54.63,45.66 54.63,42.65 54.63,41.87 54.63,41.72 56.91,39.44 59.06,39.44 60.69,37.81 v61.01,37.81
  Bottom 0.152: IC4.3 80.25,30.35 79.34,31.26 67.99,31.26 61.44,37.81 v61.01,37.81
GPIO16  (via drill 0.35)
  Top 0.152: v55,50.56 54.79,50.35 J1.27
  Bottom 0.152: v55,50.57 v55,50.56 55.3,50.26 55.3,45.73 69.47,31.56 81.69,31.56 82.8,30.45 IC4.2
GPIO17  (via drill 0.35)
  Top 0.152: v54.97,51.47 54.25,50.75 J1.28
  Bottom 0.152: IC4.1 85.34,30.36 83.83,31.87 69.59,31.87 55.61,45.86 55.61,50.84 v54.97,51.47
GPIO18  (via drill 0.35)
  Top 0.152: J1.29 51.9,51.76 v52.95,52.81
  Bottom 0.152: v52.95,52.81 52.3,52.16 52.3,51.4 52.65,51.05 53.25,51.05 53.7,51.5 53.7,51.8 57.52,55.62 63.96,55.62 66.66,58.32 R9.1
GPIO19  (via drill 0.35)
  Top 0.152: J1.30 51.5,52.35 v51.95,52.8
  Bottom 0.152: v51.95,52.8 50.9,51.75 49.45,51.75 48.9,52.3 48.9,53.25 49.71,54.06 54.22,54.06 57.02,56.86 63.45,56.86 66.64,60.06 66.64,74.2 66.01,74.83 JP1.3
GPIO20  (via drill 0.35)
  Top 0.152: J1.31 51.1,50.89 v51.49,50.5
  Bottom 0.152: v51.49,50.5 50.74,51.25 49.35,51.25 48.59,52.01 48.59,53.38 49.58,54.36 54.09,54.36 56.9,57.17 63.32,57.17 66.34,60.18 66.34,72.36 65.3,73.4 55.7,73.4 54.27,74.83 JP4.3
GPIO21  (via drill 0.35)
  Top 0.152: J1.32 50.7,52.53 v50.91,52.73
  Bottom 0.152: R11.1 74.7,82.45 67.25,75 67.25,59.8 63.7,56.26 57.27,56.26 54.47,53.45 51.62,53.45 v50.91,52.73
GPIO22  (via drill 0.35)
  Top 0.152: J1.34 49.9,52.44 v49.61,52.73
  Bottom 0.152: R12.1 68.34,76.52 66.94,75.13 66.94,59.93 63.57,56.56 57.15,56.56 54.34,53.76 50.63,53.76 v49.61,52.73
GPIO23  (via drill 0.35)
  Top 0.152: J1.35 49.5,51.15 49.74,50.91 50.05,50.91 v50.35,50.61
  Bottom 0.152: 50.35,50.5 v50.35,50.61 50.35,50.55 38.43,38.63 U1.9
GPIO24  (via drill 0.35)
  Top 0.152: J1.36 49.1,50.65 v49.14,50.61
  Bottom 0.152: v49.14,50.61 49.14,49.77 39.22,39.85 24.2,39.85 22.88,41.17 U1.5
GPIO25  (via drill 0.35)
  Top 0.152: J1.37 48.7,52.1 48,52.8 v47.9,52.8 | v26.45,53.05 24.3,53.05 17.36,59.99 R8.2 | v65.73,64.9 65.73,65 70.48,69.75 R10.1
  Bottom 0.152: v26.45,53.05 47.65,53.05 v47.9,52.8 47.9,53.12 49.45,54.67 53.96,54.67 56.77,57.47 63.2,57.47 66.03,60.31 66.03,64.9 v65.73,64.9
GPIO26/ADC0  (via drill 0.35)
  Top 0.152: v48.23,50.61 48.3,50.67 J1.38
  Bottom 0.152: v48.23,50.61 48.23,49.3 42.65,43.71 U1.11
GPIO27/ADC1  (via drill 0.35)
  Top 0.152: v47.32,50.61 47.35,50.61 47.9,51.15 J1.39
  Bottom 0.152: v47.32,50.61 47.32,48.82 43.3,44.8 26.82,44.8 25.37,46.25 U1.3
GPIO28/ADC2  (via drill 0.35)
  Top 0.152: v45.34,52.27 45.68,52.6 47.09,52.6 47.5,52.2 J1.40
  Bottom 0.152: v45.34,52.27 45.31,52.23 45.31,47.67 44.24,46.6 30.8,46.6 28.61,48.79 U1.13
GPIO29/ADC3  (via drill 0.35)
  Top 0.152: v46.07,51.71 46.07,52.07 46.3,52.3 46.9,52.3 47.1,52.1 J1.41
  Bottom 0.152: v46.07,51.71 46.07,47.99 43.18,45.1 26.95,45.1 20.72,51.33 U1.1
N$3
  Top 0.61: U$4.2 100.5,28.7 94.8,28.7 D5.A
N$4
  Top 0.152: S2.4 72.11,55.22 R3.1
N$5
  Top 0.152: R6.1 59.5,66.65 60.8,67.95 S1.4
N$6
  Top 0.152: Y1.1 61.6,46 59.48,43.88 C16.2 55.69,43.88 R5.1
N$8
  Top 0.152: R8.1 LED2.A
N$10
  Top 1.016: J3.1 15.95,7.25 18.34,9.64 IC2.11
N$11
  Top 1.016: J3.2 18.45,7.2 20.88,9.63 IC2.12
N$12
  Top 1.016: J3.3 20.95,7.05 23.42,9.52 IC2.13
N$13
  Top 1.016: J3.4 23.45,6.7 25.96,9.21 IC2.14
N$14
  Top 0.305: IC2.6 IC2.5
N$16
  Top 1.016: U$1.1 IC2.16
N$17
  Top 1.016: U$2.1 58.21,16.08 IC3.16
N$18
  Top 1.016: U$3.1 IC4.16
N$22
  Top 1.016: IC3.11 45.49,9.59 43.15,7.25 J4.1
N$23
  Top 1.016: J4.2 45.65,7.1 48.03,9.48 IC3.12
N$24
  Top 1.016: J4.3 48.15,7.05 50.57,9.47 IC3.13
N$25
  Top 1.016: J4.4 50.65,7 53.11,9.46 IC3.14
N$26
  Top 0.305: IC3.6 IC3.5
N$30
  Top 1.016: D2.C 35.85,11.82 C23.+ 36.03,11.64 U$1.2
N$31
  Top 1.016: D3.C 63.24,15.86 C24.+ 63.21,11.62 U$2.2
N$32
  Top 1.016: U$3.2 90.35,11.64 | 90.35,11.64 C25.+ | D4.C 90.35,15.9 90.35,11.64
N$33
  Top 1.016: J5.1 70.3,7.85 72.64,10.19 IC4.11
N$34
  Top 1.016: J5.2 72.8,7.05 75.18,9.43 IC4.12
N$35
  Top 1.016: J5.3 75.3,7.05 77.72,9.47 IC4.13
N$36
  Top 1.016: J5.4 77.8,6.8 80.26,9.26 IC4.14
N$37
  Top 0.305: IC4.6 IC4.5
N$39
  Top 0.305: D6.A 86.12,52.07 87.29,53.24 Q1.1 89.93,54.08 90.35,54.5 93.75,54.5 96.09,52.16 96.09,49.06 98.6,46.55 U$6.2
N$40
  Top 0.152: R7.1 LED1.A
N$41
  Bottom 0.152: R9.2 82.31,51.11 83,51.8 90.73,51.8 Q1.2
N$42
  Top 0.305: D7.A 86.15,61.65 86.15,63.95 86.87,64.67 Q2.1 89.9,64.7 89.9,65.4 90.3,65.8 93.4,65.8 96.05,63.15 96.05,59.35 98.69,56.71 U$7.2
N$43
  Bottom 0.152: R10.2 82.94,62.77 Q2.2
N$44
  Top 0.305: D8.A 86.12,76.12 87.37,77.37 Q3.1 89.93,77.98 90.4,78.45 94,78.45 96.05,76.4 96.05,69.55 98.73,66.87 U$8.2
N$45
  Bottom 0.152: R11.2 82.94,75.47 Q3.2
N$46
  Top 0.305: D9.A 72.15,76.15 73.37,77.37 Q4.1 75.96,78.21 77.15,79.4 96.3,79.4 98.67,77.03 U$9.2
N$47
  Bottom 0.152: R12.2 68.97,75.47 Q4.2
N$48
  Top 0.152: R13.1 LED3.A
N$49
  Top 0.152: R14.1 LED4.A
N$50
  Top 0.152: U$21.1 10.79,12.64 12,13.85 12,30.99 13.96,32.95 23.25,32.95 26.39,36.09 U1.8
N$52
  Top 0.152: U$19.1 10.85,22.8 11.65,23.6 11.65,31.07 19.21,38.63 U1.6
N$53
  Top 0.152: U$18.1 18.38,43.12 18.97,43.71 U1.4
N$54
  Top 0.152: U1.2 17.99,48.79 8.1,58.68 8.1,62.15 6.81,63.44 U$23.1
N$55
  Top 0.152: U$20.1 13.11,32.96 18.45,38.31 18.45,39.25 19.05,39.85 23,39.85 24.32,41.17 U1.10
N$56
  Top 0.152: U$22.2 8.07,58.28 18.85,47.5 24.65,47.5 25.9,46.25 U1.12
QSPI_SCLK
  Top 0.152: L1.6 42.09,42.88 43.43,44.23 44.18,44.23 44.47,44.52 44.47,46.02 44.81,46.36 44.81,46.73 45.23,47.15 J1.52
QSPI_SD0
  Top 0.152: L1.5 43.35,43.7 43.55,43.9 44.3,43.9 44.77,44.37 44.77,45.82 45.11,46.16 45.11,46.6 45.26,46.75 J1.53
QSPI_SD1
  Top 0.152: J1.55 45.4,45.95 45.08,45.63 45.08,44.25 43.91,43.08 43.91,41.16 43.7,40.95 43.05,40.95 40.81,38.72 L1.2
QSPI_SD2
  Top 0.152: J1.54 46.35,46.35 46.55,46.15 46.55,45.4 46.37,45.22 45.75,45.22 45.69,45.16 45.69,43.99 44.52,42.83 44.52,40.9 43.96,40.34 43.3,40.34 42.09,39.12 L1.3
QSPI_SD3
  Top 0.152: J1.51 45.2,47.55 44.51,46.85 44.51,46.5 44.16,46.16 44.16,44.67 44.03,44.54 43.3,44.54 41.85,43.08 40.98,43.08 40.81,42.91 L1.7
QSPI_SS  (via drill 0.35)
  Top 0.152: R4.1 39.53,34.94 L1.1 | L1.1 39.55,34.05 39.7,33.9 41.35,33.9 41.45,34 41.45,38.92 43.18,40.65 43.83,40.65 44.21,41.03 44.21,42.95 45.38,44.12 45.38,45.5 45.43,45.55 J1.56 | R3.2 71.47,53.59 70,55.05 v70,55.65 | L1.1 38.7,34.1 38.7,27.7 40.22,26.18 v40.65,26.18 | v65.56,37.81 64.73,36.98 64.73,33.29 61.73,30.29 61.73,25.89 60.54,24.7 v55.55,24.7
  Bottom 0.152: v70,55.65 67.2,55.65 66,54.45 66,38.25 v65.56,37.81 | v55.55,24.7 42.13,24.7 v40.65,26.18
RUN  (via drill 0.35)
  Top 0.152: J1.26 52.25,49.95 52.1,50.1 52.1,50.95 v53.05,51.9 | R6.2 59.5,63.65 61.55,61.6 66.3,61.6 v67.9,60
  Bottom 0.152: v53.05,51.9 53.35,51.9 57.4,55.95 63.83,55.95 67.88,60 v67.9,60
USB_D+
  Top 0.305: R2.1 30.25,48.3 28.45,50.1 26.1,50.1 7,69.2 7,78.42 6.42,79 J2.3
USB_D-  (via drill 0.35)
  Top 0.305: R1.1 31.75,50.4 29.8,52.35 v25.85,52.35 | v7,79.65 J2.2
  Bottom 0.305: v25.85,52.35 23.85,52.35 7.9,68.3 7.9,79.2 7.45,79.65 v7,79.65
USB_DM  (via drill 0.35)
  Top 0.152: R1.2 39.6,50.4 v39.9,50.1 | v44.53,49.24 44.83,49.55 J1.46
  Bottom 0.152: v39.9,50.1 43.67,50.1 v44.53,49.24
USB_DP
  Top 0.152: R2.2 44.54,48.3 45.39,49.15 J1.47
VSS
  Top 1.016: U$5.2 99.5,18.5 90.15,27.85 D4.A | U$5.2 96.9,18.5 90.1,25.3 65.05,25.3 63,27.35 D3.A | U$5.2 99.15,17.1 95.7,17.1 89.2,23.6 39.65,23.6 35.85,27.4 D2.A
XIN
  Top 0.152: Y1.2 62.65,39.35 60.33,41.67 C15.2 57.65,42.25 56.69,43.21 55.07,43.21 54.93,43.34 54.93,46.17 54.6,46.49 54.22,46.49 53.88,46.84 53.88,47.3 53.63,47.55 J1.20
XOUT
  Top 0.152: J1.21 53.69,47.95 54.19,47.45 54.19,46.96 54.35,46.8 55.3,46.8 55.65,46.45 R5.2

## Text on the board
tNames: BEE HIVE | MONA parallel scara V0.1 | +3V3 | +3V3 | +5V | +5V | +12V | +12V | 12V | 5V 22 | 5V | SERVO 20 | SERVO 19 | 3V3 | 25 | RESET | 12V 21 | DI 29 | BOOT | 12V 25 | 0DI 28 | 12V 18 | DI 27 | DI 26 | DI 24 | IN +12V 2X | DI 23 | ON | ON | ON | STEPPER 1 | STEPPER 2 | STEPPER 3